# EAGLE board 16-pin-rocketbus-cable-proto (EAGLE 6.4)
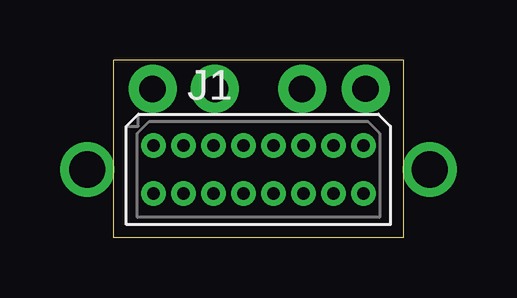
[diagram p0: board, top side]
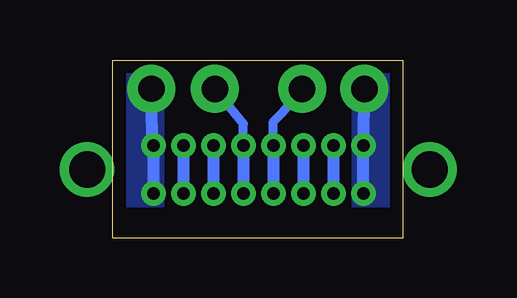
[diagram p1: board, bottom side, seen from below]

Size 12.1 x 7.4 mm. Coordinates in mm from the lower left corner, seen from the top.
Outline: 12.1,0 12.1,7.4 0,7.4 0,0 12.1,0
Copper layers (1*16): Top 0.0178mm / dielectric 59mil / Bottom 0.0178mm
Design rules "default": minimum track width 6mil, minimum drill 14mil, track to track 6mil, track to pad 6mil, pad to pad 6mil, via to via 6mil, smd to smd 6mil, copper to edge 20mil, drill to drill 16mil, minimum pad ring 8mil, minimum via ring 8mil, stop-mask expansion 3mil, vias tented up to drill 0mil, thermal gap 10mil

## Footprints (pad centres in the part's own frame; a part is rotated, then mirrored left to right if it is on the bottom)
ROCKETBUS-RECEPTACLE = drill 0.508 pad 1.016: AUX1@11 -1.875,1; AUX1@12 -1.875,-1; AUX2@13 -3.125,1; AUX2@14 -3.125,-1; B+@1 4.375,1; B+@2 4.375,-1; B-@15 -4.375,1; B-@16 -4.375,-1; CAN_H@3 3.125,1; CAN_H@4 3.125,-1; CAN_L@5 1.875,1; CAN_L@6 1.875,-1; USB_H@7 0.625,1; USB_H@8 0.625,-1; USB_L@9 -0.625,1; USB_L@10 -0.625,-1 | drill 1.511: CHASSIS@1 7.136,0; CHASSIS@2 -7.136,0

## Placement (x,y rotation side)
J1  ROCKETBUS-RECEPTACLE  [ROCKETBUS-RECEPTACLE]  6.04,2.84 0 top

## Library data of the parts
J1 = rocketbus

## Nets
AUX1: J1.AUX1@11 J1.AUX1@12
B+: J1.B+@1 J1.B+@2
B-: J1.B-@15 J1.B-@16
CAN_H: J1.CAN_H@3 J1.CAN_H@4
CAN_L: J1.CAN_L@5 J1.CAN_L@6
S$1: J1.AUX2@13 J1.AUX2@14
USB1_D+: J1.USB_H@7 J1.USB_H@8
USB1_L: J1.USB_L@9 J1.USB_L@10

## Tracks (layer width: path | path; a pad name or v marks a point on that pad's centre or on a via)
AUX1
  Bottom 0.508: J1.AUX1@11 J1.AUX1@12
B+  (via drill 1.1 pad 2)
  Bottom 0.508: J1.B+@2 J1.B+@1 10.44,3.94 10.52,6.12 10.37,6.22 v10.5,6.2
  pour Bottom (isolate 0.1, no thermals): 10,1.3 10,7.2 11.5,7.2 11.5,1.3
B-  (via drill 1.1 pad 2)
  Bottom 0.508: J1.B-@16 J1.B-@15 1.6,6.2
  other vias: 1.62,6.2
  pour Bottom (isolate 0.1, no thermals): 0.6,1.3 0.6,7.2 2.1,7.2 2.1,1.3
CAN_H
  Bottom 0.508: J1.CAN_H@3 J1.CAN_H@4
CAN_L
  Bottom 0.508: J1.CAN_L@5 J1.CAN_L@6
S$1
  Bottom 0.508: J1.AUX2@13 J1.AUX2@14
USB1_D+  (via drill 1.1 pad 2)
  Bottom 0.381: v7.85,6.2 6.65,4.73 6.66,4.73 J1.USB_H@7
  Bottom 0.508: J1.USB_H@7 J1.USB_H@8
USB1_L  (via drill 1.1 pad 2)
  Bottom 0.381: v4.22,6.2 5.02,5.23 5.41,4.83 J1.USB_L@9
  Bottom 0.508: J1.USB_L@9 J1.USB_L@10

## Text on the board
Document: TOP VIEW (JST CONNECTOR FACING UP) | B- | B+ | USB1_D- | USB1_D+